# Altium PCB TEMP_SENS.PcbDoc
Units mm, origin at the board's own origin, x right, y up, seen from the top; angles counter-clockwise.
Board outline 25.1 x 8 mm, 2 copper layers (Top Layer, Bottom Layer), stack 1.071 mm thick; 7 components, 4 nets, 19 pads, 2 vias.
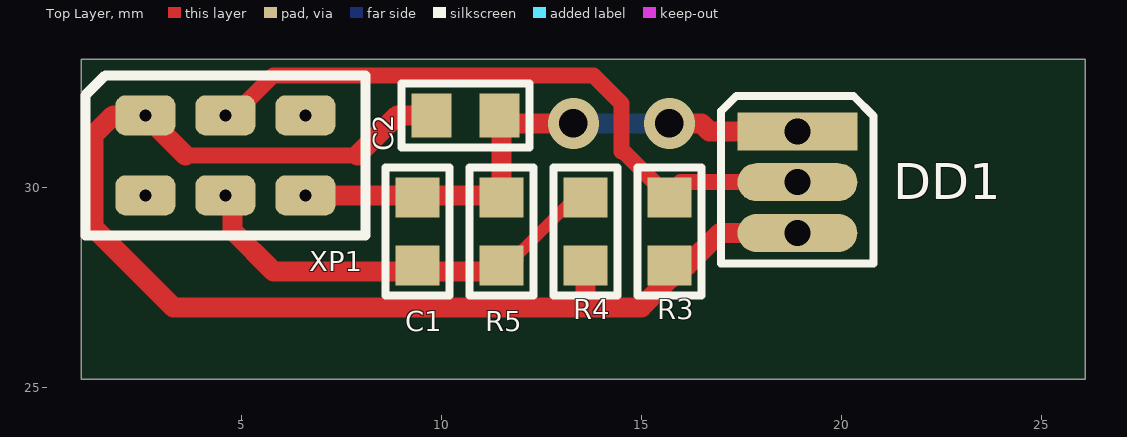
[diagram p0: Top Layer view]
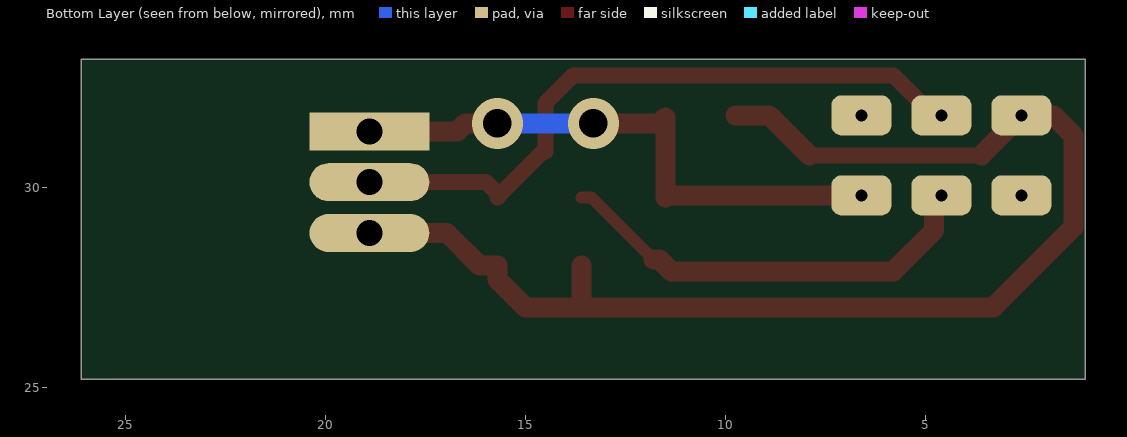
[diagram p1: Bottom Layer view, seen from below]

## Layer stack, top to bottom
Top Layer: signal copper 0.0356
Dielectric: core 1, FR-4, Dk 4.8
Bottom Layer: signal copper 0.0356

## Board outline
1,25.2 1,33 1,33.2 26.1,33.2 26.1,25.2

## Design rules (kind name [scope] priority, off if disabled: settings)
Clearance [All] p1: gap=0.2
HoleSize HoleSize_1 [All] p1: absolutevalues=TRUE maxlimit=4 minlimit=0.025 maxpercent=80.000 minpercent=20.000
HoleSize [All] p2: absolutevalues=TRUE maxlimit=2.54 minlimit=0.025 maxpercent=80.000 minpercent=20.000
MinimumSolderMaskSliver MinimumSolderMaskSliver_1 [All] p1: minsoldermaskwidth=0
MinimumSolderMaskSliver [All] p2: minsoldermaskwidth=0
PolygonConnect PolygonConnect_isVia [isVia] p1: connectstyle=Direct reliefconductorwidth=0.254 reliefentries=4 polygonreliefangle="90 Angle"
PolygonConnect [All] p2: connectstyle=Relief reliefconductorwidth=0.254 reliefentries=4 polygonreliefangle="90 Angle"
RoomDefinition TEMP_SENS [InComponentClass('TEMP_SENS')] p1: confinementstyle=ConfineIn formatcopy=TRUE lockcomponents=FALSE outline -0.7,23.9 31.6,23.9 31.6,34 -0.7,34
RoutingVias [All] p1: holewidth=0.711 width=1.27 viastyle="Through Hole" minholewidth=0.2 minwidth=0.6 maxholewidth=0.711 maxwidth=1.27
SilkToSilkClearance SilkToSilkClearance_1 [All] p1: silktosilkclearance=0
SilkToSilkClearance [All] p2: silktosilkclearance=0
SilkscreenOverComponentPads SilkToSolderMaskClearance [IsPad] p1: minsilkscreentomaskgap=0
SolderMaskExpansion [All] p1: expansion=0.1
Width Width_1 [All] p1: maxlimit=5 minlimit=0.1 preferedwidth=0.3
Width [All] p2: maxlimit=5 minlimit=0.254 preferedwidth=0.254
24 further rules are at their usual default settings.

## Components (designator, comment, footprint, x,y, rotation, side; value= is the part's Value field where it differs from the comment)
C1 "0,01uF" Cap_0805 9.4,28.9 r90 top
C2 "0.47uF" Cap_0805 10.6,31.8 r180 top
DD1 "DS18B20" DS18B20 18.9,31.4 r0 top
R3 "10k" Res_0805 15.7,28.9 r90 top
R4 "1M" Res_0805 13.6,28.9 r270 top
R5 "270k" Res_0805 11.5,28.9 r270 top
XP1 "BAR_SENS" SENS_LEGS 2.6,31.3 r0 top

## Footprints (in the part's own frame and the unit in brackets; to place one, negate y for a bottom-side part, rotate by r counter-clockwise, add the part's x,y. Pads: shape width x height; smd on the part's side, far side on the other; paste and mask are expansions set on the pad)
Cap_0805 [mm]
  rect 1x1.1 smd: 1(-0.85,0) 2(0.85,0)
  silkscreen extent -1.6,-0.8 1.6,0.8
DS18B20 [mm] "DS18B20"
  rect 3x0.95 hole 0.65: 1(0,0)
  oval 3x0.95 hole 0.65: 2(0,-1.27) 3(0,-2.54)
  silkscreen extent -1.91,-3.3 1.91,0.89
Res_0805 [mm]
  rect 1x1.1 smd: 1(-0.85,0) 2(0.85,0)
  silkscreen extent -1.6,-0.8 1.6,0.8
SENS_LEGS [mm]
  rrect50% 1.5x1 hole 0.3: 1(0,0.5) 2(0,-1.5) 3(2,0.5) 4(2,-1.5) 5(4,0.5) 6(4,-1.5)
  silkscreen extent -1.5,-2.5 5.5,1.5

## Part data
C1 C2: library part Cap_0805
R3 R4 R5: library part Res_0805

## Via types
v1: diameter 1.27, hole 0.711, Top Layer to Bottom Layer, 2 vias

## Nets (pads, with @x,y where several pads share a name; then routed paths per layer and width w, separated by ;. In a path a pad name is that pad's centre, name@x,y a point inside that pad or via, vN(x,y) a via of type N, cw(c..) or ccw(c..) an arc to the next point about the centre after c; other vN are vias at no path point)
GND: C1.2 C2.1 DD1.1 R5.1 XP1.6 | length 14.5
  Top Layer w0.5: XP1.6 R5.1@11.5,29.8 ; R5.1 R5.1@11.5,29.8 ; v1(13.3,31.6) 11.65,31.6 11.5,31.75 R5.1@11.5,29.8 ; v1(15.7,31.6) 16.5,31.6 16.7,31.4 DD1.1 DD1.1@19,31.4
  Bottom Layer w0.5: v1(13.3,31.6) v1(15.7,31.6)
NetC1_1: C1.1 R4.1 R5.2 XP1.4 | length 11
  Top Layer w0.24: XP1.4@4.78,29.536 XP1.4@5.044,29.8
  Top Layer w0.3: R5.2@11.8,28.2 13.35,29.75 R4.1
  Top Layer w0.5: XP1.4@4.78,29.536 4.78,28.92 5.8,27.9 10.3,27.9 11.35,27.9 11.65,28.2 R5.2@11.8,28.2
NetDD1_2: DD1.2 R3.2 XP1.3 | length 17.7
  Top Layer w0.3: XP1.3 XP1.3@4.8,31.8
  Top Layer w0.4: XP1.3@4.8,31.8 5.8,32.8 13.8,32.8 14.5,32.1 14.5,30.9 14.55,30.9 R3.2 ; R3.2@15.65,29.8 15.98,30.13 DD1.2@19.7,30.13
VCC: C2.2 DD1.3 R3.1 R4.2 XP1.1 | length 32.2
  Top Layer w0.4: 3.6,30.8 7.9,30.8
  Top Layer w0.5: 3.6,30.8 XP1.1 1.8,31.8 1.3,31.3 1.3,29 3.3,27 13.6,27 ; 7.9,30.8 8.9,31.8 C2.2 ; R4.2 13.6,27 ; DD1.3 16.96,28.86 16.15,28.05 R3.1 15.7,27.7 15,27 14.8,27 13.6,27
pads on no net: XP1.2 XP1.5

## Silkscreen, mask and mechanical layers (free items; w line width, h text height)
Mechanical 1:
  lines w0.254: 1,25.2 1,33.2 26.1,33.2 26.1,25.2 1,25.2